# Altium PCB Ver4.PcbDoc
Units mil, origin at the board's own origin, x right, y up, seen from the top; angles counter-clockwise.
Board outline 1803.15 x 1803.15 mil, 2 copper layers (Top Layer, Bottom Layer); 33 components, 29 nets, 198 pads, 42 vias.
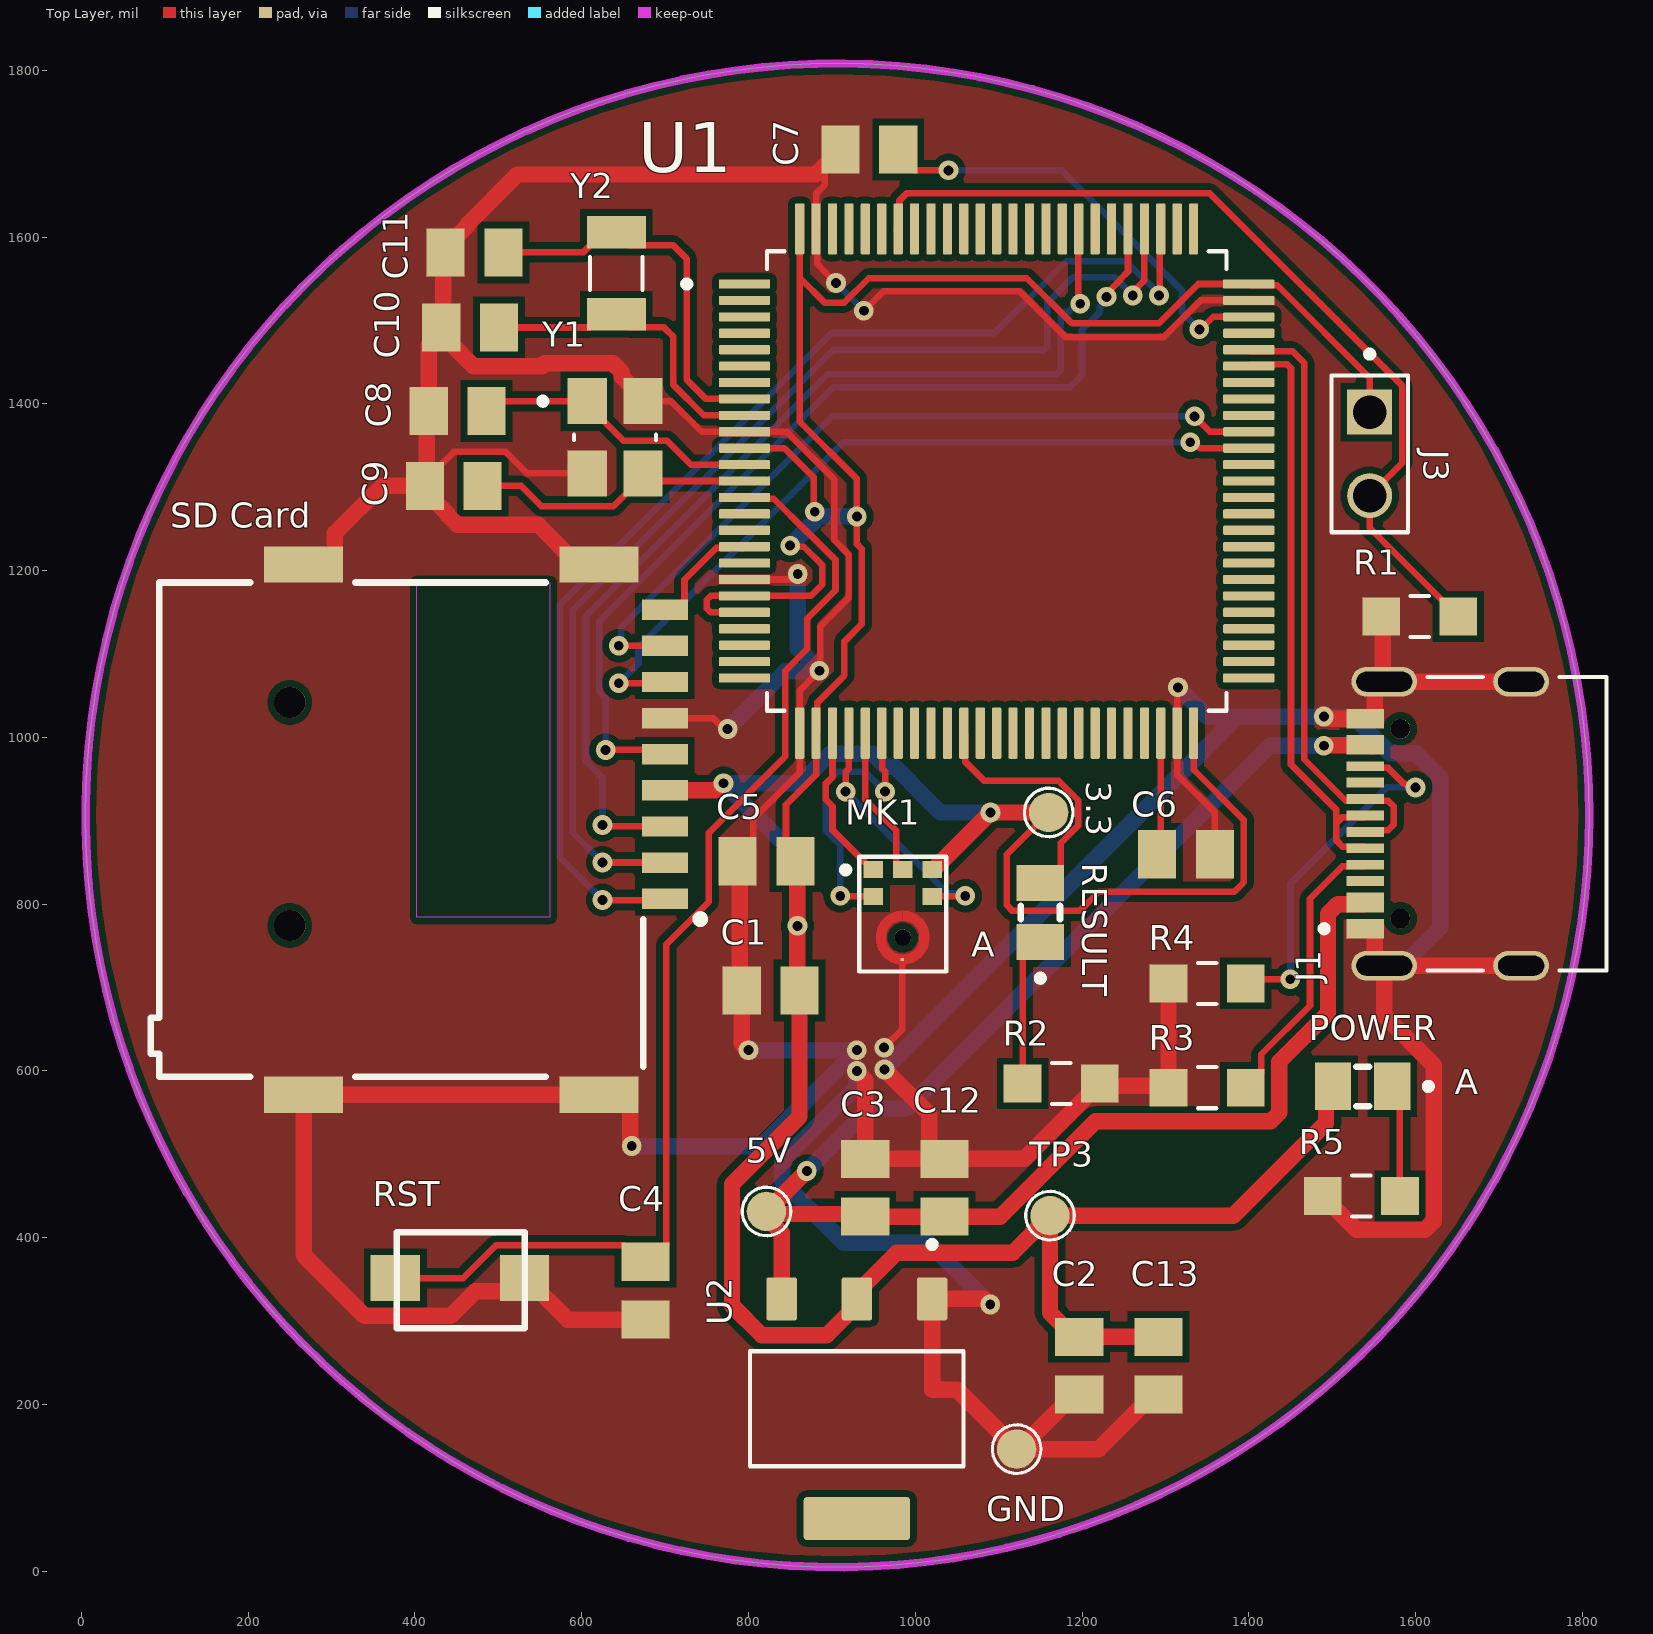
[diagram p0: Top Layer view]
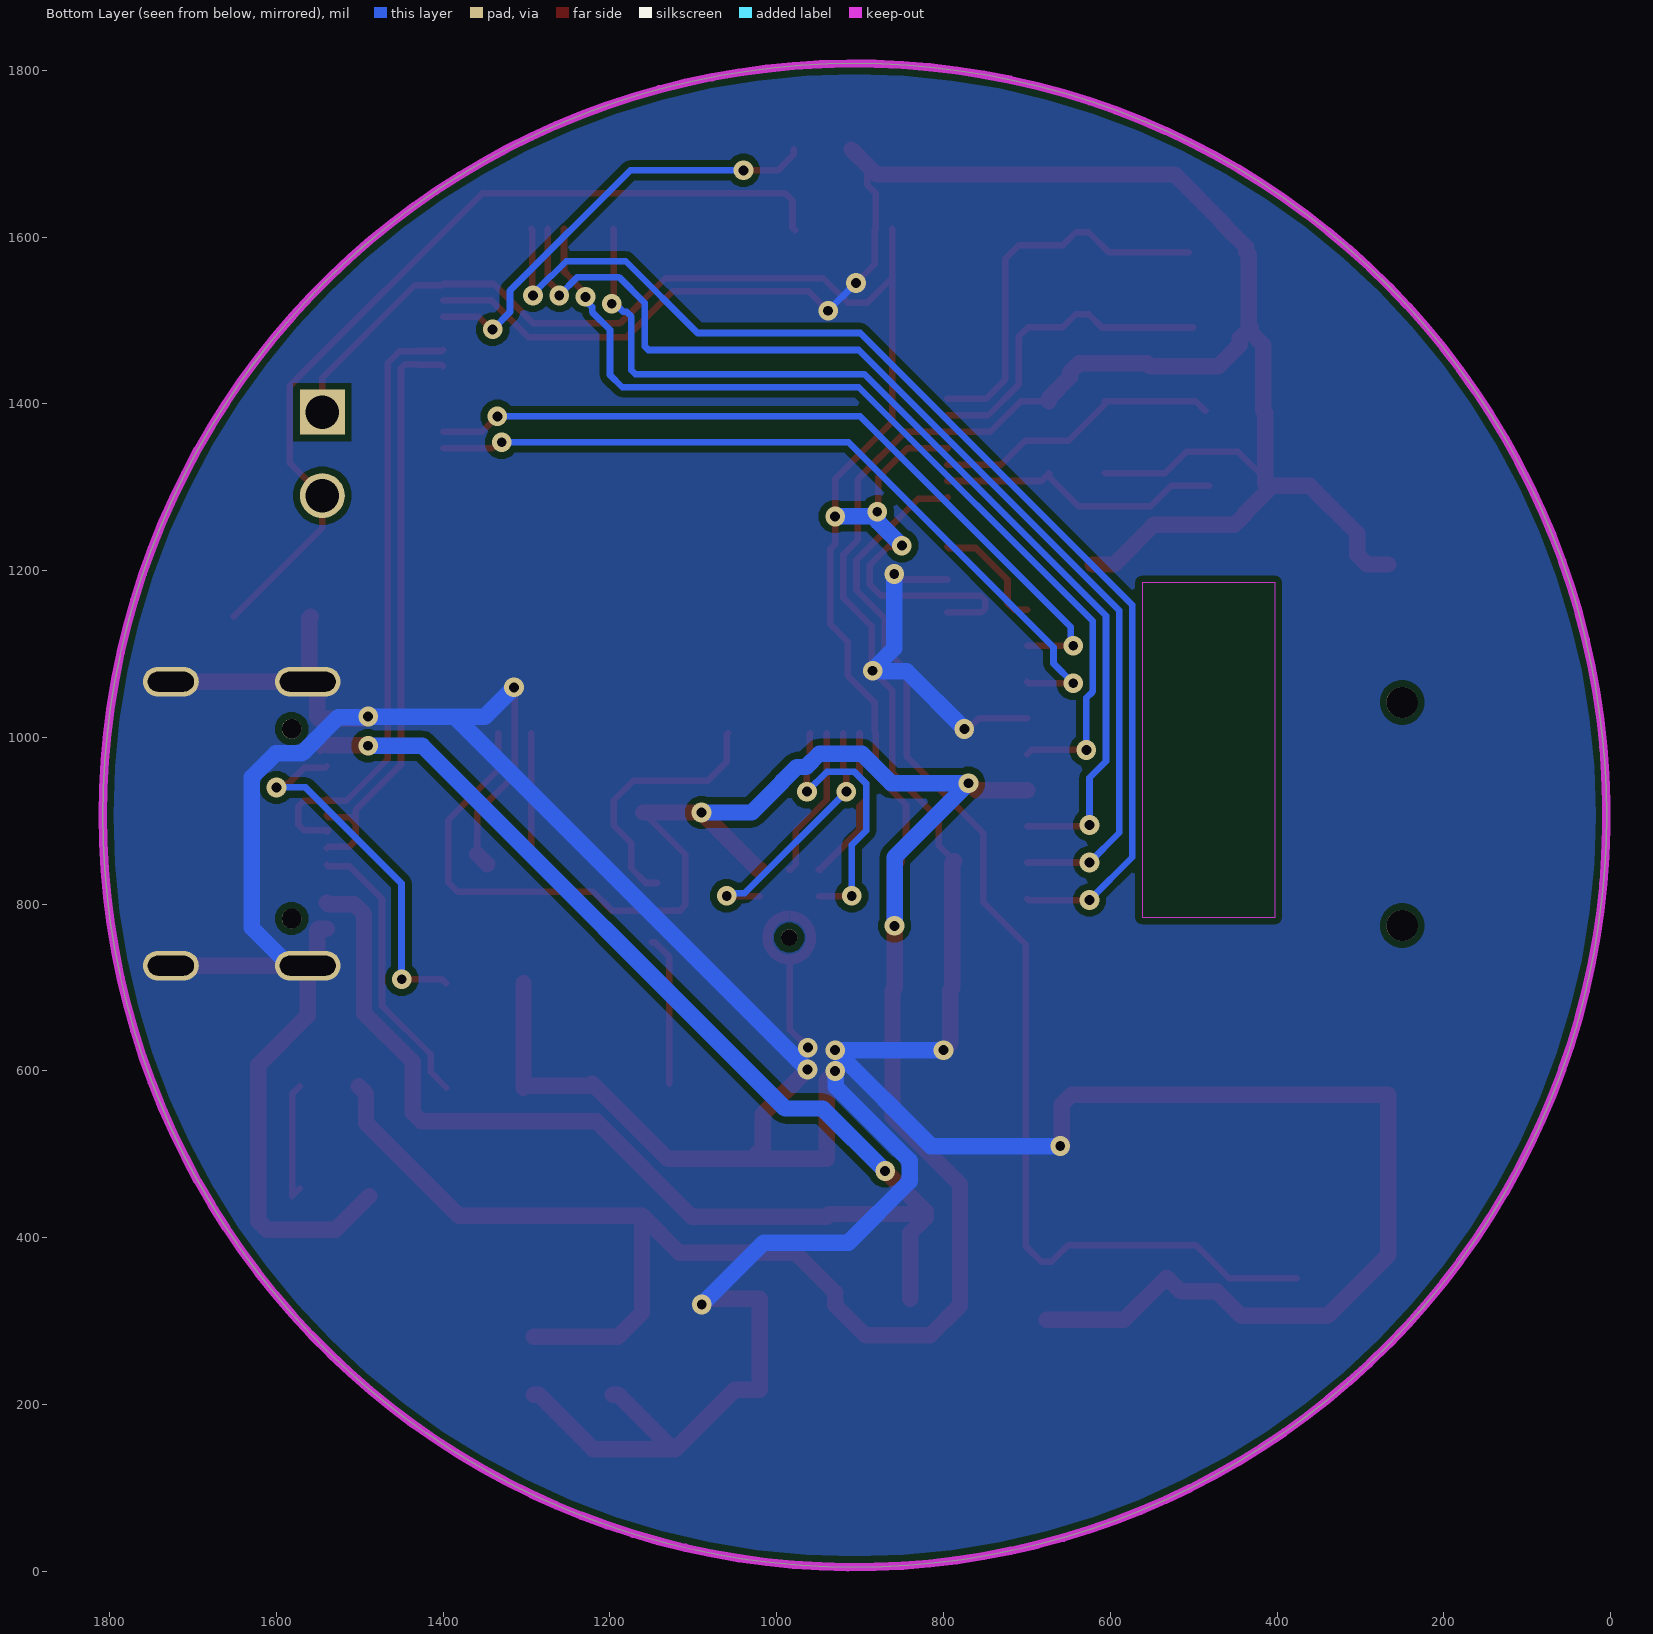
[diagram p1: Bottom Layer view, seen from below]
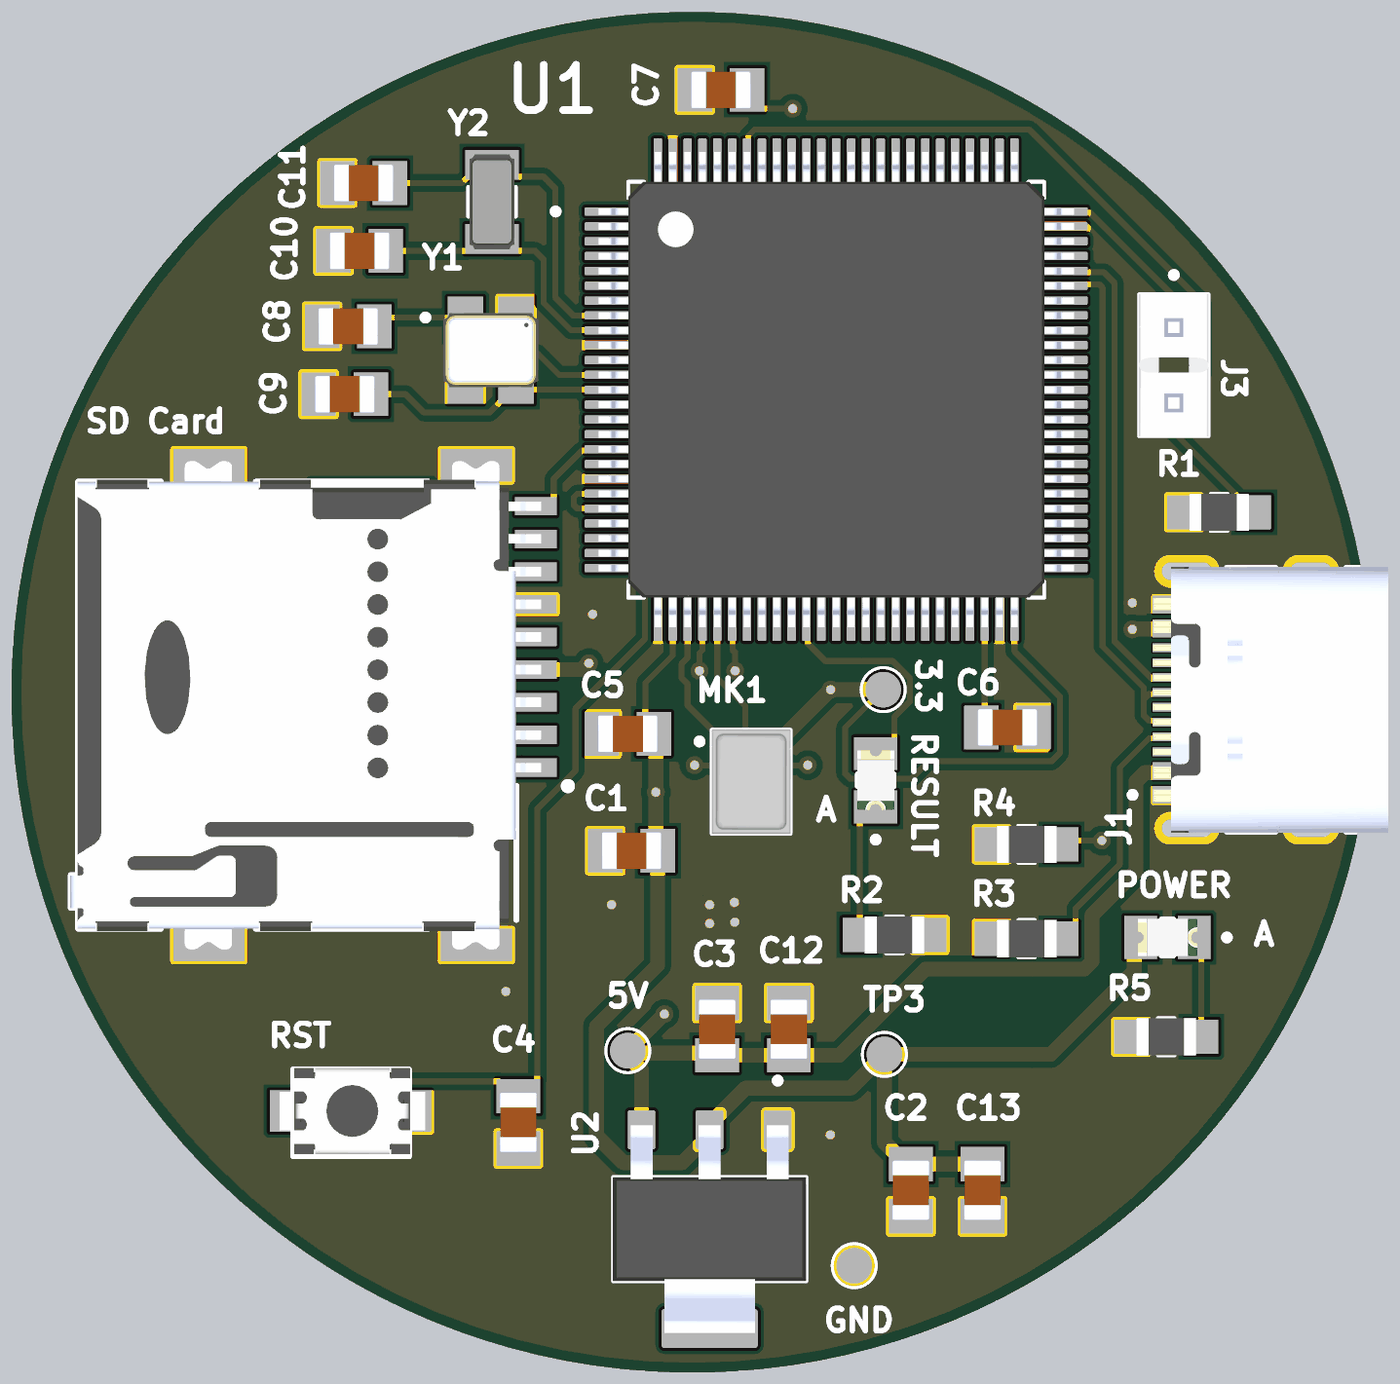
[diagram p2: 3D render of the assembled board from above, using the file's embedded part models]

## Layer stack, top to bottom
Top Solder: solder mask 0.4, Solder Resist, Dk 3.5
Top Layer: signal copper 1.4
Dielectric 1: dielectric 12.6, FR-4, Dk 4.8
Bottom Layer: signal copper 1.4
Bottom Solder: solder mask 0.4, Solder Resist, Dk 3.5

## Board outline
5,906.57 ccw(c906.57,906.57) 906.57,5 ccw(c906.57,906.57) 1808.15,906.57 ccw(c906.57,906.57) 906.57,1808.15 ccw(c906.57,906.57)

## Design rules (kind name [scope] priority, off if disabled: settings)
Clearance [All] p1: gap=7.87 ignorepadtopadclearanceinfootprint=TRUE
DiffPairsRouting [All] p1: maxlimit=10 minlimit=7.87 mostfreqgap=7.87 toplayer_minwidth=7.87 toplayer_maxwidth=7.87 toplayer_prefwidth=7.87 bottomlayer_minwidth=7.87 bottomlayer_maxwidth=7.87 bottomlayer_prefwidth=7.87 maxuncoupledlength=500
PolygonConnect [All] p1: connectstyle=Direct reliefconductorwidth=10 reliefentries=4 polygonreliefangle="90 Angle" airgapwidth=10
RoutingVias [All] p1: holewidth=11.81 width=23.62 viastyle="Through Hole" minholewidth=11.81 minwidth=23.62 maxholewidth=11.81 maxwidth=23.62
SMDNeckDown UI [IsPad and IsComponentPad and InComponent('U1')] p1: percent=80.000
SolderMaskExpansion Via [IsVia] p1: expansion=4 istentingtop=TRUE
SolderMaskExpansion SolderMaskExpansion_1 [All] p2: expansion=4 istentingtop=FALSE
SupplyNets "Schematic Supply Nets_3" [InNet('+3.3V')] p1: voltage=0.000
SupplyNets "Schematic Supply Nets_2" [InNet('GND')] p2: voltage=0.000
SupplyNets "Schematic Supply Nets" [InNet('+5V')] p3: voltage=0.000
Width Width_Power [InNet('GND') or InNet('+5V') or InNet('+3.3V') or InNet('VBUS')] p1: maxlimit=19.68 minlimit=7.87 preferedwidth=7.87
Width [All] p2: maxlimit=7.87 minlimit=7.87 preferedwidth=7.87
29 further rules are at their usual default settings.

## Classes and differential pairs
differential pair USB: +USB_P -USB_N

## Components (designator, comment, footprint, x,y, rotation, side; value= is the part's Value field where it differs from the comment)
3.3 "Test point" PCBComponent_1 1160,910 r0 top (schematic designator TP1)
5V "Test point" PCBComponent_1 821.57,431.57 r90 top (schematic designator TP2)
C1 "0.1uF" CAPC2012X94N 826.57,696.57 r180 top
C2 "10 µF" CAPC2012X94N 1196.57,246.57 r270 top
C3 "10 µF" CAPC2012X94N 940,460 r90 top
C4 "0.1 µF" CAPC2012X94N 676.57,336.57 r270 top
C5 "0.1uF" CAPC2012X94N 821.57,851.57 r180 top
C6 "2.2uF" CAPC2012X94N 1324.65,860 r180 top
C7 "2.2uF" CAPC2012X94N 945,1705 r0 top
C8 "12pF" CAPC2012X94N 451.22,1391.57 r180 top
C9 "12pF" CAPC2012X94N 446.57,1301.57 r180 top
C10 "12.5pF" CAPC2012X94N 466.22,1491.57 r180 top
C11 "12.5pF" CAPC2012X94N 471.57,1581.57 r180 top
C12 "0.1 µF" CAPC2012X94N 1035,460 r90 top
C13 "0.1 µF" CAPC2012X94N 1291.57,246.57 r270 top
GND "Test point" PCBComponent_1 1121.57,146.57 r90 top (schematic designator TP4)
J1 "TYPE-C-31-M-12" HRO_TYPE-C-31-M-12 1726.57,896.57 r90 top locked
J3 "3-644456-2" TE_3-644456-2 1545,1390 r270 top
MK1 "ICS-43434" MIC_ICS-43434 985,788.07 r0 top locked
POWER "597-5411-407F" LEDC2012X70N 1536.57,581.57 r180 top
R1 "10k" RES_ERJU06J203V 1605,1145 r0 top
R2 "1K" RES_ERJU06J203V 1175,585 r180 top
R3 "5.1k" RES_ERJU06J203V 1350,580 r180 top
R4 "5.1k" RES_ERJU06J203V 1350,705 r180 top
R5 "1K" RES_ERJU06J203V 1535,450 r0 top
RESULT "597-5411-407F" LEDC2012X70N 1150,790 r90 top
RST "Button" Button2PSMD 456.57,346.57 r0 top
"SD Card" "MEM2075-00-140-01-A" GCT_MEM2075-00-140-01-A 250.04,908.19 r270 top locked
TP3 "Test point" PCBComponent_1 1161.57,426.57 r90 top
U1 "STM32H743VIT6" QFP50P1600X1600X160-100N 1097.64,1307.48 r0 top locked
U2 "AMS1117-3.3" SOT229P700X180-4N 930,195 r270 top
Y1 "26MHz" XTAL_C3E-24.000-12-3030-R 640.04,1359.88 r0 top
Y2 "32.7680K" XTAL_FC-135_32.7680KA-A0 641.57,1556.57 r90 top

## Footprints (in the part's own frame and the unit in brackets; to place one, negate y for a bottom-side part, rotate by r counter-clockwise, add the part's x,y. Pads: shape width x height; smd on the part's side, far side on the other; paste and mask are expansions set on the pad)
Button2PSMD [mil]
  rect 59.06x55.12 smd: 2(-80,5) 3(75,5)
  silkscreen extent -78,-55 75,60, body extent -96,-52 96,62, height 79
CAPC2012X94N [mm]
  rect 1.16x1.47 smd: 1(-0.88,0) 2(0.88,0)
  body extent -1,-0.63 1,0.63, height 0.94
GCT_MEM2075-00-140-01-A [mm]
  rect 0.62x1.4 smd: P1(2.58,11.42) P2(1.48,11.42) P3(0.38,11.42) P4(-0.72,11.42) P5(-1.82,11.42) P6(-2.92,11.42) P7(-4.02,11.42) P8(-5.12,11.42) P9(-6.22,11.42)
  rect 1.1x2.4 smd: SH1(-7.6,0.42) SH2(-7.6,9.42) SH3(8.55,9.42) SH4(8.55,0.42)
  round 0.95 hole 0.95 unplated: ""(-3.4,0) ""(3.4,0)
  Keep-Out Layer region: 3.15,3.87 -7.05,3.87 -7.05,7.92 3.15,7.92
  silkscreen extent -7.05,-4.23 8,12.62, body extent -7.74,-4.25 8.7,11.6, height 1.45
HRO_TYPE-C-31-M-12 [mm]
  rect 0.6x1.14 smd mask+0.05: A1_B12(-3.2,4.75) A4_B9(-2.4,4.75) B1_A12(3.2,4.75) B4_A9(2.4,4.75)
  rect 0.3x1.14 smd mask+0.05: A5(-1.25,4.75) A6(-0.25,4.75) A7(0.25,4.75) A8(1.25,4.75) B5(1.75,4.75) B6(0.75,4.75) B7(-0.75,4.75) B8(-1.75,4.75)
  oval 0.9x2 hole 0.6 slot 1.7 at 90 deg: S1(-4.325,4.17) S2(4.325,4.17)
  oval 0.9x1.7 hole 0.6 slot 1.4 at 90 deg: S3(-4.325,0) S4(4.325,0)
  round 0.6 hole 0.6 unplated: ""(-2.89,3.68) ""(2.89,3.68)
  silkscreen extent -4.47,-2.6 4.47,6.1, body extent -4.47,-2.6 4.47,5.31, height 3.31
LEDC2012X70N [mm]
  rect 1.1x1.45 smd: A(0.9,0) C(-0.9,0)
  silkscreen extent -2.1,-0.6 0.2,0.6, body extent -1,-0.63 1,0.63, height 0.7
MIC_ICS-43434 [mm]
  rect 0.6x0.522 smd paste-0.05: 1(-0.9,1.361) 2(-0.9,0.539) 4(0.9,0.539) 5(0.9,1.361) 6(0,1.361)
  rect 0.1x0.1 smd paste-1 mask+0: 3(-0.015,-1.383)
  round 0.5 hole 0.5 unplated mask+0.665: ""(0,-0.713)
  Top Layer region: 250 vertices and 0 holes, not listed, extent -0.81,-1.53 0.81,0.1
  silkscreen extent -1.84,-1.75 1.33,1.75, body extent -1.33,-1.75 1.33,1.75, height 0.98
PCBComponent_1 [mm]
  round 1.2 smd paste+0: TP?(0,0)
  silkscreen extent -0.74,-0.74 0.74,0.74, body extent -0.6,-0.6 0.6,0.6, height 0.03
QFP50P1600X1600X160-100N [mm]
  rrect25% 1.56x0.28 smd: 1(-7.68,6) 2(-7.68,5.5) 3(-7.68,5) 4(-7.68,4.5) 5(-7.68,4) 6(-7.68,3.5) 7(-7.68,3) 8(-7.68,2.5) 9(-7.68,2) 10(-7.68,1.5) 11(-7.68,1) 12(-7.68,0.5) 13(-7.68,0) 14(-7.68,-0.5) 15(-7.68,-1) 16(-7.68,-1.5) 17(-7.68,-2) 18(-7.68,-2.5) 19(-7.68,-3) 20(-7.68,-3.5) 21(-7.68,-4) 22(-7.68,-4.5) 23(-7.68,-5) 24(-7.68,-5.5) 25(-7.68,-6) 51(7.68,-6) 52(7.68,-5.5) 53(7.68,-5) 54(7.68,-4.5) 55(7.68,-4) 56(7.68,-3.5) 57(7.68,-3) 58(7.68,-2.5) 59(7.68,-2) 60(7.68,-1.5) 61(7.68,-1) 62(7.68,-0.5) 63(7.68,0) 64(7.68,0.5) 65(7.68,1) 66(7.68,1.5) 67(7.68,2) 68(7.68,2.5) 69(7.68,3) 70(7.68,3.5) 71(7.68,4) 72(7.68,4.5) 73(7.68,5) 74(7.68,5.5) 75(7.68,6)
  rrect25% 0.28x1.56 smd: 26(-6,-7.68) 27(-5.5,-7.68) 28(-5,-7.68) 29(-4.5,-7.68) 30(-4,-7.68) 31(-3.5,-7.68) 32(-3,-7.68) 33(-2.5,-7.68) 34(-2,-7.68) 35(-1.5,-7.68) 36(-1,-7.68) 37(-0.5,-7.68) 38(0,-7.68) 39(0.5,-7.68) 40(1,-7.68) 41(1.5,-7.68) 42(2,-7.68) 43(2.5,-7.68) 44(3,-7.68) 45(3.5,-7.68) 46(4,-7.68) 47(4.5,-7.68) 48(5,-7.68) 49(5.5,-7.68) 50(6,-7.68) 76(6,7.68) 77(5.5,7.68) 78(5,7.68) 79(4.5,7.68) 80(4,7.68) 81(3.5,7.68) 82(3,7.68) 83(2.5,7.68) 84(2,7.68) 85(1.5,7.68) 86(1,7.68) 87(0.5,7.68) 88(0,7.68) 89(-0.5,7.68) 90(-1,7.68) 91(-1.5,7.68) 92(-2,7.68) 93(-2.5,7.68) 94(-3,7.68) 95(-3.5,7.68) 96(-4,7.68) 97(-4.5,7.68) 98(-5,7.68) 99(-5.5,7.68) 100(-6,7.68)
  silkscreen extent -9.54,-7 7,7, body extent -8,-8 8,8, height 1.6
RES_ERJU06J203V [mm]
  rect 1.15x1.15 smd: 1(-1.175,0) 2(1.175,0)
  silkscreen extent -0.28,-0.62 0.28,0.62, body extent -1,-0.63 1,0.63, height 0.6
SOT229P700X180-4N [mm]
  rrect15% 1.31x0.93 smd: 1(-3.345,2.29) 2(-3.345,0) 3(-3.345,-2.29)
  rrect15% 1.31x3.24 smd: 4(3.345,0)
  silkscreen extent -5.1,-3.25 1.75,3.25, body extent -3.5,-3.25 3.5,3.25, height 1.8
TE_3-644456-2 [mm]
  rect 1.37x1.37 / inner round 1.37 / far side rect 1.37x1.37 hole 1.02: 1(0,0)
  round 1.37 hole 1.02: 2(2.54,0)
  silkscreen extent -1.87,-1.17 3.66,1.17, body extent -1.12,-1.17 3.66,1.17, height 10.03
XTAL_C3E-24.000-12-3030-R [mm]
  rect 1.2x1.4 smd: 1(-0.85,1.1) 2(-0.85,-1.1) 3(0.85,-1.1) 4(0.85,1.1)
  silkscreen extent -2.3,-0.08 1.25,1.2, body extent -1.25,-1.6 1.25,1.6, height 0.75
XTAL_FC-135_32.7680KA-A0 [mm]
  rect 1x1.8 smd: 1(-1.25,0) 2(1.25,0)
  silkscreen extent -0.5,-0.8 0.5,0.8, body extent -1.6,-0.75 1.6,0.75, height 0.9

## Part data
3.3 5V GND TP3: library part Test_Point
C1 C4 C5 C6 C7 C8 C9 C10 C11 C12 C13: library part CL10B104KB8NNNC, "CAP 0805", Package="1608-2 SAMSUNG", Check_prices=https://www.snapeda.com/parts/CL10B104KB8NNNC/Samsung/view-part/?ref=eda, MF="Samsung Electro-Mechanics", MP=CL10B104KB8NNNC, SnapEDA_Link=https://www.snapeda.com/parts/CL10B104KB8NNNC/Samsung/view-part/?ref=snap
C2 C3: library part 0805YC103J4T2A, "10uF 0805 SMD", Package="2012 AVX", Check_prices=https://www.snapeda.com/parts/0805YC103J4T2A/AVX/view-part/?ref=eda, MF=AVX, MP=0805YC103J4T2A, SnapEDA_Link=https://www.snapeda.com/parts/0805YC103J4T2A/AVX/view-part/?ref=snap
J1: "USB Connectors 24 Receptacle 1 8.94*7.3mm RoHS", Package=Package, Check_prices=https://www.snapeda.com/parts/TYPE-C-31-M-12/HRO+Electronics+Co.%252C+Ltd./view-part/?ref=eda, MF="HRO Electronics Co., Ltd.", MP=TYPE-C-31-M-12, SnapEDA_Link=https://www.snapeda.com/parts/TYPE-C-31-M-12/HRO+Electronics+Co.%252C+Ltd./view-part/?ref=snap
J3: "HEADER ASSEMBLY, NARROW, MTA-100, 2 POSITION, STRAIGHT", Package=None, Check_prices=https://www.snapeda.com/parts/3-644456-2/TE+Connectivity+AMP+Connectors/view-part/?ref=eda, MF="TE Connectivity", MP=3-644456-2, SnapEDA_Link=https://www.snapeda.com/parts/3-644456-2/TE+Connectivity+AMP+Connectors/view-part/?ref=snap
MK1: "60 Hz ~ 20 kHz Digital, IÂ²S Microphone MEMS (Silicon) 1.65 V ~ 3.63 V Omnidirectional (-26 Â±1dB @ 94dB SPL) Solder Pads", Package="Custom Package TDK InvenSense", Availability="In Stock", Check_prices=https://www.snapeda.com/parts/ICS-43434/TDK+InvenSense/view-part/?ref=eda, MF="TDK InvenSense", MP=ICS-43434, Price=None, Purchase-URL=https://pricing.snapeda.com/search/part/ICS-43434/?ref=eda, SnapEDA_Link=https://www.snapeda.com/parts/ICS-43434/TDK+InvenSense/view-part/?ref=snap
POWER RESULT: "SMD LED 0805 YG 7", Package="0805 Dialight", Check_prices=https://www.snapeda.com/parts/597-5411-407F/Dialight/view-part/?ref=eda, MF=Dialight, MP=597-5411-407F, SnapEDA_Link=https://www.snapeda.com/parts/597-5411-407F/Dialight/view-part/?ref=snap
R1 R2 R3 R4 R5: library part R0805, "R0805", Package=None, Availability=Unavailable, MP=ERJU06J203V, Price=None
RST: library part Component_1
"SD Card": "9 (8 + 1) Position Card Connector microSD Surface Mount, Right Angle Gold", Package=None, Check_prices=https://www.snapeda.com/parts/MEM2075-00-140-01-A/Global+Connector+Technology/view-part/?ref=eda, MF="Global Connector Technology", MP=MEM2075-00-140-01-A, SnapEDA_Link=https://www.snapeda.com/parts/MEM2075-00-140-01-A/Global+Connector+Technology/view-part/?ref=snap
U1: "ARMÂ® CortexÂ®-M7 STM32H7 Microcontroller IC 32-Bit Single-Core 480MHz 2MB (2M x 8) FLASH 100-LQFP (14x14)", Package="LQFP-100 STMicroelectronics", Check_prices=https://www.snapeda.com/parts/STM32H743VIT6/STMicroelectronics/view-part/?ref=eda, MF=STMicroelectronics, MP=STM32H743VIT6, SnapEDA_Link=https://www.snapeda.com/parts/STM32H743VIT6/STMicroelectronics/view-part/?ref=snap
U2: "Sot223/Pkg 1-Amp 3.3-Volt Low Drop Out Voltage Regulatator", Package="SOT-223 Seeed Technology", Check_prices=https://www.snapeda.com/parts/AMS1117-3.3/Advanced+Monolithic+Systems/view-part/?ref=eda, MF="Advanced Monolithic Systems", MP=AMS1117-3.3, SnapEDA_Link=https://www.snapeda.com/parts/AMS1117-3.3/Advanced+Monolithic+Systems/view-part/?ref=snap
Y1: library part C3E-24.000-12-3030-R, "3225SMD", Package=None, Availability=Unavailable, MP=C3E-24.000-12-3030-R, Price=None
Y2: library part FC-135_32.7680KA-A0, "32.768 kHz Â±20ppm Crystal 12.5pF 70 kOhms 2-SMD, No Lead / 3215SMD", Package="SMD-2 Epson", Check_prices=https://www.snapeda.com/parts/FC-135%2032.7680KA-A0/EPSON/view-part/?ref=eda, MF=EPSON, MP="FC-135 32.7680KA-A0", SnapEDA_Link=https://www.snapeda.com/parts/FC-135%2032.7680KA-A0/EPSON/view-part/?ref=snap

## Via types
v1: diameter 23.62, hole 11.81, Top Layer to Bottom Layer, tented both sides, 42 vias

## Nets (pads, with @x,y where several pads share a name; then routed paths per layer and width w, separated by ;. In a path a pad name is that pad's centre, name@x,y a point inside that pad or via, vN(x,y) a via of type N, cw(c..) or ccw(c..) an arc to the next point about the centre after c; other vN are vias at no path point)
+3.3V: 3.3.TP? "SD Card.P4" C1.1 C2.1 C5.1 C13.1 J3.1 MK1.5 POWER.A TP3.TP? U1.11 U1.20 U1.21 U1.27 U1.50 U1.75 U1.100 U2.2 | length 5347.4
  Top Layer w7.87: U1.21 754.61,1150 750,1154.61 750,1165 754.69,1169.69 U1.20 874.69,1169.69 888.62,1183.62 888.62,1206.38 866.33,1228.67 851.33,1228.67 v1(850,1230) ; U1.11 843.15,1346.85 878.35,1311.65 878.35,1271.65 v1(879.46,1270.54) ; C5.1 845,862.8 845,919.14 881.1,955.24 U1.27 882.68,1006.69 882.68,1042 915,1074.32 915,1115 935.87,1135.87 935.87,1225.95 930,1231.81 v1(930,1265) 930,1310 861.42,1378.58 861.42,1551.24 ; U1.100 861.42,1551.24 ; 3.3.TP? 1109.65,859.65 1109.65,798.89 1116.56,791.97 1196.97,791.97 1220,815 1382.77,815 1393.94,826.17 1393.94,901.06 1333.86,961.14 U1.50 ; J3.1 1545,1431.13 1434.01,1542.13 1401.57,1542.13 U1.75 1339.37,1543.7 1292.12,1496.46 1188.05,1496.46 1133.76,1550.75 944.15,1550.75 914.78,1521.38 891.28,1521.38 861.42,1551.24
  Top Layer w19.68: 699.65,936.54 760.47,936.54 768.93,945 v1(770,945) ; C5.1 858.72,849.07 v1(858.72,774.07) 858.72,699.07 C1.1 861.22,545.11 780.24,464.12 780.24,318.76 815.81,283.19 893.98,283.19 930,319.21 U2.2 ; U2.2@930,334.17 977.8,381.97 1116.97,381.97 TP3.TP? ; MK1.5 1021.97,841.65 v1(1090.31,910) 3.3.TP? ; C13.1 C2.1 1190.47,281.22 1161.57,310.12 TP3.TP? ; POWER.A 1492.57,573 1492.57,537.57 1381.57,426.57 TP3.TP?
  Bottom Layer w19.68: v1(850,1230) 878.71,1258.71 878.71,1269.79 v1(879.46,1270.54) ; v1(858.72,774.07) 858.72,856.28 v1(770,945) 862.51,945 897.78,980.28 949.13,980.28 964.87,964.53 976.01,964.53 993.31,947.23 993.31,946.69 1030,910 v1(1090.31,910) ; v1@880,1270 881.07,1270 886.07,1265 v1(930,1265)
+5V: 5V.TP? C3.1 C12.1 J1.A4_B9 J1.B4_A9 U2.3 | length 2055.5
  Top Layer w7.87: J1.B4_A9 J1.B4_A9@1547.44,983.19
  Top Layer w19.68: U2.3 839.84,405.85 821.57,424.12 5V.TP? ; v1(870,480) 5V.TP? ; v1(1490,990) 1490.53,990.53 1539.04,990.53 J1.B4_A9 ; J1.A4_B9 1537.6,800.12 1506.53,800.12 1495,788.59 1495,669.38 1436.61,610.99 1436.61,550.02 1426.24,539.65 1216.18,539.65 1101.89,425.35 C12.1 C3.1 936.89,428.46 824.69,428.46 5V.TP?
  Bottom Layer w19.68: v1(870,480) 945,555 990,555 1425,990 v1(1490,990)
BOOT0: J3.2 R1.2 U1.94 | length 1077.7
  Top Layer w7.87: U1.94@977.95,1608.27 U1.94 ; R1.2 1545.04,1251.22 J3.2 J3.2 1583.78,1328.78 1583.78,1421.86 1353.28,1652.36 989.62,1652.36 981.1,1643.85 U1.94@981.1,1611.42 ; U1.94 U1.94@981.1,1611.42 ; U1.94 U1.94@981.1,1611.42
GND: "SD Card.P6" "SD Card.SH1" "SD Card.SH2" "SD Card.SH3" "SD Card.SH4" C1.2 C2.2 C3.2 C4.2 C5.2 C6.1 C7.1 C8.2 C9.2 C10.2 C11.2 C12.2 C13.2 GND.TP? J1.A1_B12 J1.B1_A12 J1.S1 J1.S2 J1.S3 J1.S4 MK1.3 R1.1 R2.1 R3.2 R4.2 R5.1 RST.3 U1.10 U1.19 U1.26 U1.49 U1.74 U1.99 U2.1 Y1.2 Y1.4 | length 10001.9
  Top Layer w7.87: C9.2@411.93,1307.68 446.57,1342.32 508.95,1342.32 534.7,1316.57 Y1.2 ; Y1.4 707.27,1403.19 743.92,1366.54 U1.10 845.74,1366.54 903.08,1309.19 903.08,1236.46 920.12,1219.42 920.12,1167.17 886.33,1133.38 886.33,1081.33 861.42,1056.42 U1.26 861.42,957.83 805.83,902.24 805.83,870.47 C5.2 ; 699.65,1023.15 757.59,1023.15 770.74,1010 v1(775,1010) ; U1.19 848.23,1189.37 854.8,1195.94 v1(859.06,1195.94) ; C7.1@891.46,1686.1 891.46,1662.6 881.1,1652.24 U1.99 882.68,1608.27 882.68,1567.32 891.57,1558.43 v1(905,1545) ; v1(938.41,1511.59) 961.81,1535 1125,1535 1180,1480 1297.94,1480 1341.95,1524.02 U1.74 ; v1(962.71,628.02) 984.39,649.7 MK1.3 ; v1(1315,1060) 1314.17,1059.17 U1.49 1314.17,955.02 1359.29,909.9 C6.1
  Top Layer w19.68: 266.57,1207.4 292.17,1207.4 303.98,1219.21 303.98,1244.8 360.75,1301.57 C9.2 ; RST.3 515.69,335.69 472.52,335.69 443.13,306.3 339.71,306.3 266.57,379.43 266.57,571.57 620.91,571.57 646.5,571.57 658.31,559.76 658.31,512.76 660,511.07 v1(660,510) ; RST.3@533.54,351.57 583.19,301.93 C4.2 ; 620.91,1207.4 595.32,1207.4 547.8,1254.92 451.05,1254.92 438.84,1267.13 438.84,1268.56 411.93,1295.47 C9.2 ; Y1.4 673.5,1407.13 647.91,1432.72 647.91,1438.09 637.54,1448.46 555.89,1448.46 552.34,1444.92 470.69,1444.92 444.57,1471.05 444.57,1478.58 C10.2 ; C5.2 789.43,849.07 789.43,699.07 C1.2 791.93,633.07 v1(800,625) ; C7.1 891.46,1686.1 880.35,1675 522.82,1675 463.84,1616.02 463.84,1614.59 436.93,1587.68 C11.2 434.25,1578.9 434.25,1494.25 C10.2 ; v1(930,600) 930,598.93 940,588.93 C3.2 C12.2 ; v1(963.22,601.86) 1017,548.07 1017,507.64 1029.99,494.65 C12.2 ; C12.2@1028.9,494.65 C12.2 ; v1(1090,320) 1088.93,320 1082.24,326.69 U2.1 1020.16,217.99 1050.16,217.99 GND.TP? ; C2.2 1190.47,211.93 1125.12,146.57 GND.TP? ; C13.2 1285.47,211.93 1220.12,146.57 GND.TP? ; R4.2 R3.2 1301.24,582.5 1223.76,582.5 R2.1 1130.91,494.65 C12.2 ; C6.1@1347.2,847.91 C6.1 ; R5.1 1529.09,409.65 1611.24,409.65 1621.61,420.02 1621.61,607.22 1562.4,666.43 J1.S1 ; v1(1490,1025) 1491.07,1025 1493.51,1022.56 J1.B1_A12 ; J1.A1_B12 1549.02,770.59 1550.98,768.62 1550.98,733.57 1558.26,726.3 J1.S1 ; J1.B1_A12@1549.02,1022.56 1550.98,1024.53 1550.98,1059.58 1558.26,1066.85 J1.S2 ; R1.1 1560.57,1143.17 1560.57,1068.68 J1.S2 ; J1.S3 J1.S1 ; J1.S4 J1.S2 ; C9.2 414.25,1303.9 414.25,1389.25 C8.2 416.57,1470.47 431.57,1485.47 C10.2
  Bottom Layer w7.87: v1(905,1545) v1(938.41,1511.59)
  Bottom Layer w19.68: v1(660,510) 815,510 v1(930,625) v1(800,625) ; v1(775,1010) 844.25,1079.25 884.25,1079.25 v1(885,1080) 885,1081.07 859.06,1107 v1(859.06,1195.94) ; v1(930,600) 929.25,599.25 929.25,581 840.47,492.23 840.47,467.77 913.98,394.26 1015.74,394.26 v1(1090,320) ; v1(963.22,601.86) 1386.36,1025 ; v1(1315,1060) 1350,1025 1386.36,1025 ; J1.S1 1584.06,726.3 1629.53,771.77 1629.53,952.23 1600.93,980.83 1569.46,980.83 1526.04,1024.25 1490.75,1024.25 v1(1490,1025) 1386.36,1025
LedResult: RESULT.A U1.36 | length 318.5
  Top Layer w7.87: U1.36 1059.84,1003.54 1059.84,971.11 1083.06,947.89 1172.22,947.89 1195.43,924.68 1195.43,894.33 1174.61,873.5 1174.61,843.15 1156.89,825.43 RESULT.A RESULT.A@1143.11,825.43
LR: MK1.2 U1.31 | length 339.9
  Top Layer w7.87: v1(910,810) 910.71,809.29 MK1.2 ; U1.31 960.67,1004.29 960.67,962.56 963.78,959.45 v1(963.78,935)
  Bottom Layer w7.87: v1(910,810) 910,870.98 892.91,888.07 892.91,944.78 906.75,958.62 940.16,958.62 v1(963.78,935)
NetC4_1: C4.1 RST.2 U1.14 | length 1404.2
  Top Layer w7.87: RST.2 457.78,351.57 497.16,390.94 650.75,390.94 670.47,371.22 C4.1 682.68,371.22 701.57,390.12 701.57,752.08 752.28,802.78 752.28,885.4 844.09,977.22 844.09,1079.78 870.58,1106.27 870.58,1142.69 904.37,1176.48 904.37,1212.9 870.89,1246.38 870.22,1246.38 830.37,1286.22 796.85,1286.22 U1.14
NetPOWER_C: POWER.C R5.2 | length 148.5
  Top Layer w7.87: R5.2@1572.01,459.25 R5.2 1581.26,572.32 POWER.C
NetR2_2: R2.2 RESULT.C | length 180.4
  Top Layer w7.87: R2.2 1128.74,736.85 1146.46,754.57 RESULT.C
PC15-OSC32-IN: C11.1 U1.8 Y2.2 | length 466.8
  Top Layer w7.87: C11.1 601.61,1581.57 625.83,1605.79 Y2.2 657.32,1590.04 709.96,1590.04 725.75,1574.25 725.75,1429.25 749.09,1405.91 U1.8
PC15-OSC32-OUT: C10.1 U1.9 Y2.1 | length 384.9
  Top Layer w7.87: C10.1 610.04,1491.57 625.83,1507.36 Y2.1 657.32,1491.61 698.77,1491.61 710,1480.39 710,1422.73 746.51,1386.22 U1.9
PH0-OSC-IN: C8.1 U1.12 Y1.1 | length 344.1
  Top Layer w7.87: C8.1 497.48,1403.19 Y1.1 ; Y1.1@606.57,1399.25 649.88,1355.94 702.02,1355.94 730.8,1327.17 U1.12
PH1-OSC_OUT: C9.1 U1.13 Y1.3 | length 346.5
  Top Layer w7.87: C9.1 527.42,1301.57 551.79,1277.2 638.07,1277.2 673.5,1312.64 Y1.3 682.6,1307.48 U1.13
SCK: MK1.4 U1.29 | length 306.8
  Top Layer w7.87: v1(916.54,935) 916.54,958.62 920.47,962.56 U1.29 ; MK1.4 1020.79,809.65 1059.65,809.65 v1(1060,810)
  Bottom Layer w7.87: v1(916.54,935) 1038.52,813.01 1056.99,813.01 v1(1060,810)
SDI: MK1.6 U1.30 | length 182.9
  Top Layer w7.87: U1.30 940.16,925.22 977.13,888.25 977.13,847.99 983.46,841.65 MK1.6
SDIO_CLK: "SD Card.P5" U1.80 | length 1130
  Top Layer w7.87: v1(628.78,985) 694.49,985 699.65,979.84 ; v1(1229.31,1528.33) 1229.31,1532 1246.56,1549.24 1246.56,1550.06 1255.12,1558.62 U1.80
  Bottom Layer w7.87: v1(628.78,985) 628.78,1047.34 620.91,1055.22 620.91,1139.31 901.59,1420 1185.39,1420 1200,1434.61 1200,1488.83 1221.46,1510.29 1221.46,1516.22 1229.31,1524.07 v1(1229.31,1528.33)
SDIO_CMD: "SD Card.P3" U1.83 | length 1210.8
  Top Layer w7.87: v1(625,895) 626.77,893.23 699.65,893.23 ; U1.83 1195.53,1609.31 1195.53,1522.39 v1(1197.84,1520.08)
  Bottom Layer w7.87: v1(625,895) 625,951.59 605.16,971.44 605.16,1145.83 895.07,1435.75 1169.64,1435.75 1174.25,1440.36 1174.25,1504.69 1179.82,1510.26 1183.76,1510.26 1193.58,1520.08 v1(1197.84,1520.08)
SDIO_D0: "SD Card.P7" U1.65 | length 945.2
  Top Layer w7.87: v1(644.53,1065) 698.19,1065 699.65,1066.46 ; v1(1329.82,1353.93) 1334.08,1353.93 1341.17,1346.85 U1.65
  Bottom Layer w7.87: v1(644.53,1065) 668.15,1088.62 668.15,1108.15 913.93,1353.93 v1(1329.82,1353.93)
SDIO_D1: "SD Card.P8" U1.66 | length 943.7
  Top Layer w7.87: v1(644.53,1110) 699.41,1110 699.65,1109.76 ; v1(1335,1385) 1353.22,1366.78 1399.75,1366.78 U1.66
  Bottom Layer w7.87: v1(644.53,1110) 647.54,1113.01 647.54,1132.54 900,1385 v1(1335,1385)
SDIO_D2: "SD Card.P1" U1.78 | length 1438.7
  Top Layer w7.87: v1(625,805) 698.03,805 699.65,806.61 ; v1(1292.26,1530) 1292.99,1530.73 1292.99,1608.35 U1.78
  Bottom Layer w7.87: v1(625,805) 573.66,856.34 573.66,1158.88 899.78,1485 1095,1485 1181.07,1571.07 1252.33,1571.07 1269.74,1553.66 1270.55,1553.66 1292.26,1531.95 v1(1292.26,1530)
SDIO_D3: "SD Card.P2" U1.79 | length 1354
  Top Layer w7.87: v1(625,850) 699.57,850 699.65,849.92 ; v1(1260.76,1530.04) 1260.76,1534.3 1274.8,1548.34 U1.79
  Bottom Layer w7.87: v1(625,850) 589.41,885.59 589.41,1152.36 901.66,1464.61 1153.89,1464.61 1158.5,1469.23 1158.5,1521.23 1189.23,1551.96 1239.1,1551.96 1260.76,1530.29 v1(1260.76,1530.04)
SDIO_NCD: "SD Card.P9" U1.17 | length 143.3
  Top Layer w7.87: 699.65,1153.07 715,1153.07 723.27,1161.34 723.27,1189.16 761.27,1227.17 793.7,1227.17 U1.17
USB_CC1: J1.A5 R3.1 | length 341.6
  Top Layer w7.87: R3.1 1414.96,598.7 1414.96,619.96 1473.35,678.35 1473.35,806.51 1512.23,845.39 1537.6,845.39 J1.A5
USB_CC2: J1.B5 R4.1 | length 439.3
  Top Layer w7.87: R4.1 1401.26,710 v1(1449.72,710) ; J1.B5 1541.54,963.5 1566.9,963.5 1586.14,944.26 1587.51,944.26 1588.76,943.01 1596.99,943.01 v1(1600,940)
  Bottom Layer w7.87: v1(1449.72,710) 1450,710.28 1450,825 1565,940 v1(1600,940)
USB_N: J1.A7 J1.B7 U1.70 | length 719
  Top Layer w7.87: U1.70 1401.57,1446.85 1429.92,1446.85 1430.32,1447.24 1446.02,1447.24 1450.63,1442.63 1450.63,967.4 1505,913.03 1505,897.22 ; J1.B7 1537.6,869.02 1512.23,869.02 1505,876.25 1505,897.22 ; J1.A7 1537.6,904.45 1512.23,904.45 1505,897.22
USB_P: J1.A6 J1.B6 U1.71 | length 745.3
  Top Layer w7.87: U1.71 1401.57,1463.39 1429.92,1463.39 1430.32,1462.99 1452.54,1462.99 1466.38,1449.15 1466.38,973.93 1516.17,924.13 J1.B6@1537.6,924.13 ; J1.A6 1537.6,888.7 1566.9,888.7 1573.82,895.62 1573.82,917.22 1566.9,924.13 J1.B6@1537.6,924.13 ; J1.B6 J1.B6@1537.6,924.13
VCAP1: C6.2 U1.48 | length 147
  Top Layer w7.87: C6.2 1294.49,864.49 U1.48
VCAP2: C7.2 U1.73 | length 534.5
  Top Layer w7.87: C7.2 979.65,1698.9 998.54,1680 v1(1040,1680) ; v1(1340.67,1489.33) 1342.48,1489.33 1357.48,1504.33 U1.73
  Bottom Layer w7.87: v1(1040,1680) 1175.66,1680 1319.85,1535.81 1319.85,1510.15 v1(1340.67,1489.33)
WS: MK1.1 U1.28 | length 191.1
  Top Layer w7.87: U1.28 900.79,952.66 892.91,944.78 892.91,925.22 900.79,917.34 900.79,888.9 948.03,841.65 MK1.1
pads on no net: "SD Card." J1. J1.A8 J1.B8 MK1. U1.1 U1.2 U1.3 U1.4 U1.5 U1.6 U1.7 U1.15 U1.16 U1.18 U1.22 U1.23 U1.24 U1.25 U1.32 U1.33 U1.34 U1.35 U1.37 U1.38 U1.39 U1.40 U1.41 U1.42 U1.43 U1.44 U1.45 U1.46 U1.47 U1.51 U1.52 U1.53 U1.54 U1.55 U1.56 U1.57 U1.58 U1.59 U1.60 U1.61 U1.62 U1.63 U1.64 U1.67 U1.68 U1.69 U1.72 U1.76 U1.77 U1.81 U1.82 U1.84 U1.85 U1.86 U1.87 U1.88 U1.89 U1.90 U1.91 U1.92 U1.93 U1.95 U1.96 U1.97 U1.98 U2.4

## Polygon pours and split planes (outlines as drawn)
GND on Bottom Layer "GND_L02_P007" (solid, remove dead copper, pour order 7): 0,1820 0,0 2095,0 1955,140 1955,1915 95,1915
GND on Bottom Layer "GND_L02_P000" (solid, remove dead copper, pour order 0): 975,650 985,635 985,590 970,575 920,575 915,580 910,590 910,635 920,650
GND on Top Layer "GND_L01_P006" (solid, remove dead copper, pour order 6): 0,0 2000,0 2015,15 2015,1870 40,1870 0,1830

## Keep-outs
Keep-Out Layer:
  circle w10: c906.57,906.57 r901.57

## Silkscreen, mask and mechanical layers (free items; w line width, h text height)
Top Overlay:
  text "A" at 1067,737 h30
  text "A" at 1647,572 h30